# Altium PCB LPEDT_Assignment1_PCB.PcbDoc
Units mil, origin at the board's own origin, x right, y up, seen from the top; angles counter-clockwise.
Board outline 984.25 x 984.25 mil, 2 copper layers (Top Layer, Bottom Layer); 16 components, 8 nets, 37 pads, 8 vias.
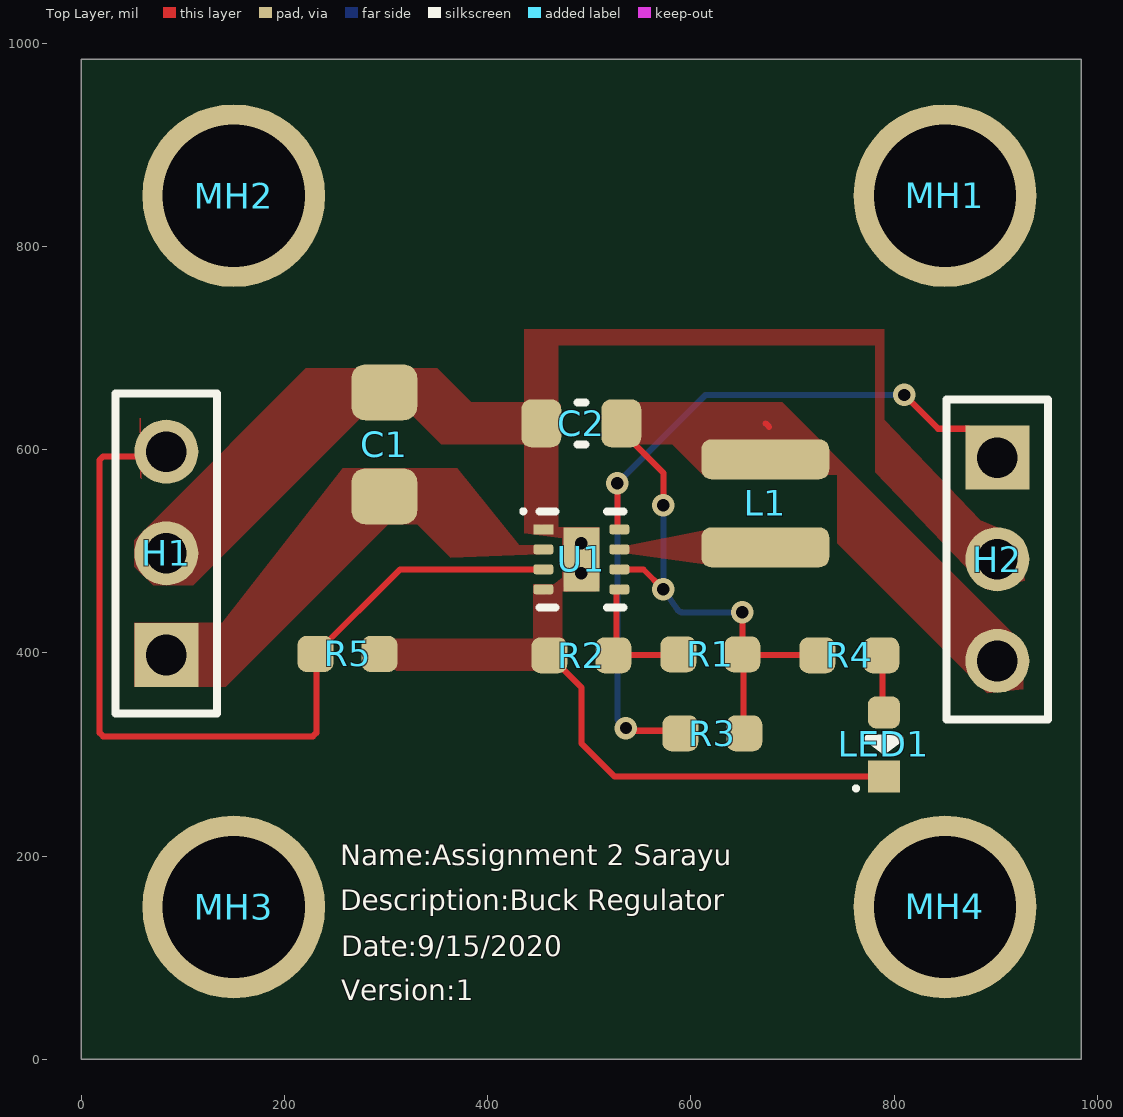
[diagram p0: Top Layer view]
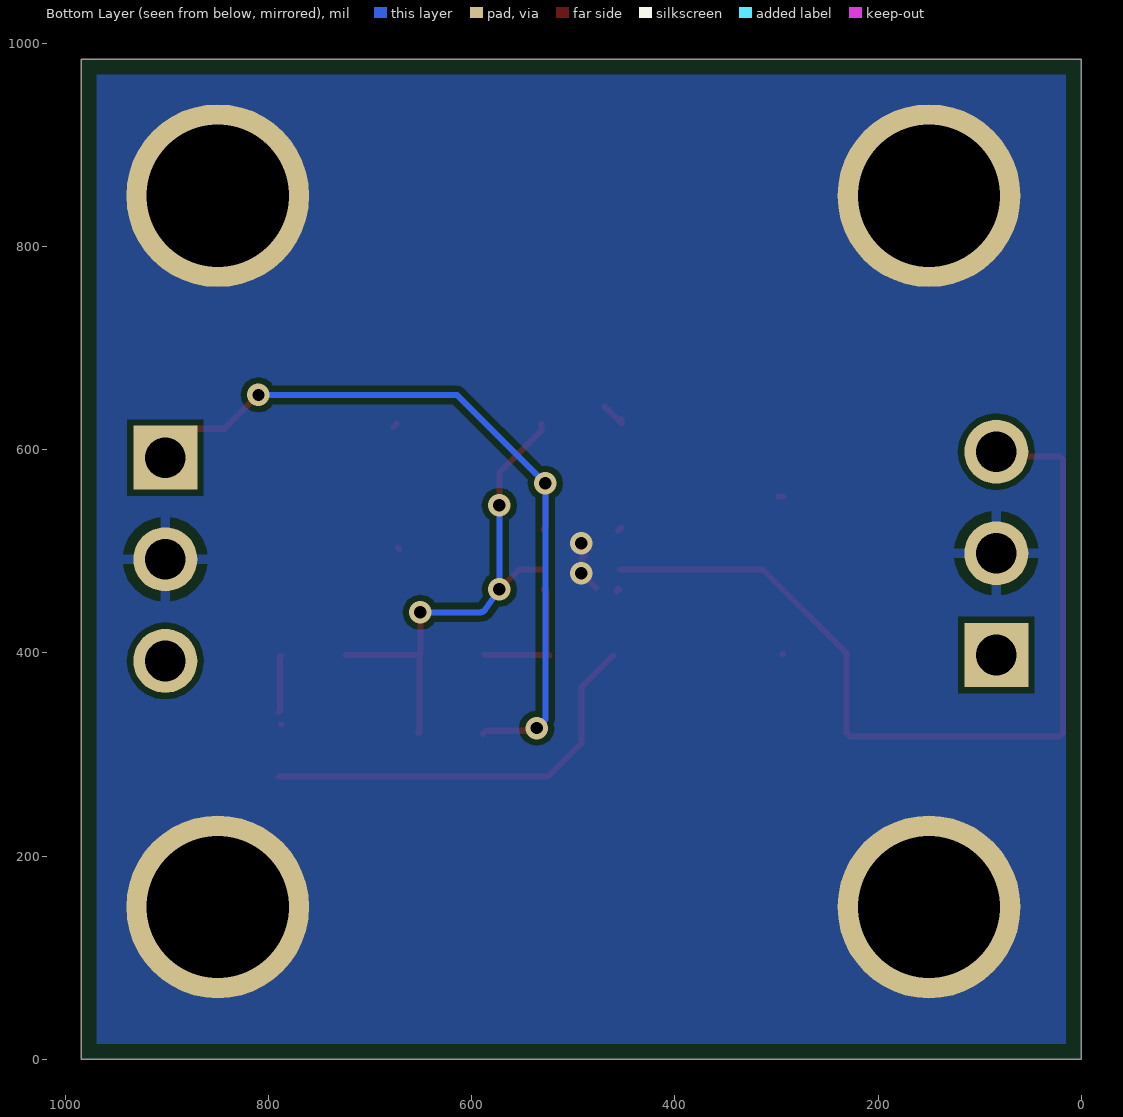
[diagram p1: Bottom Layer view, seen from below]
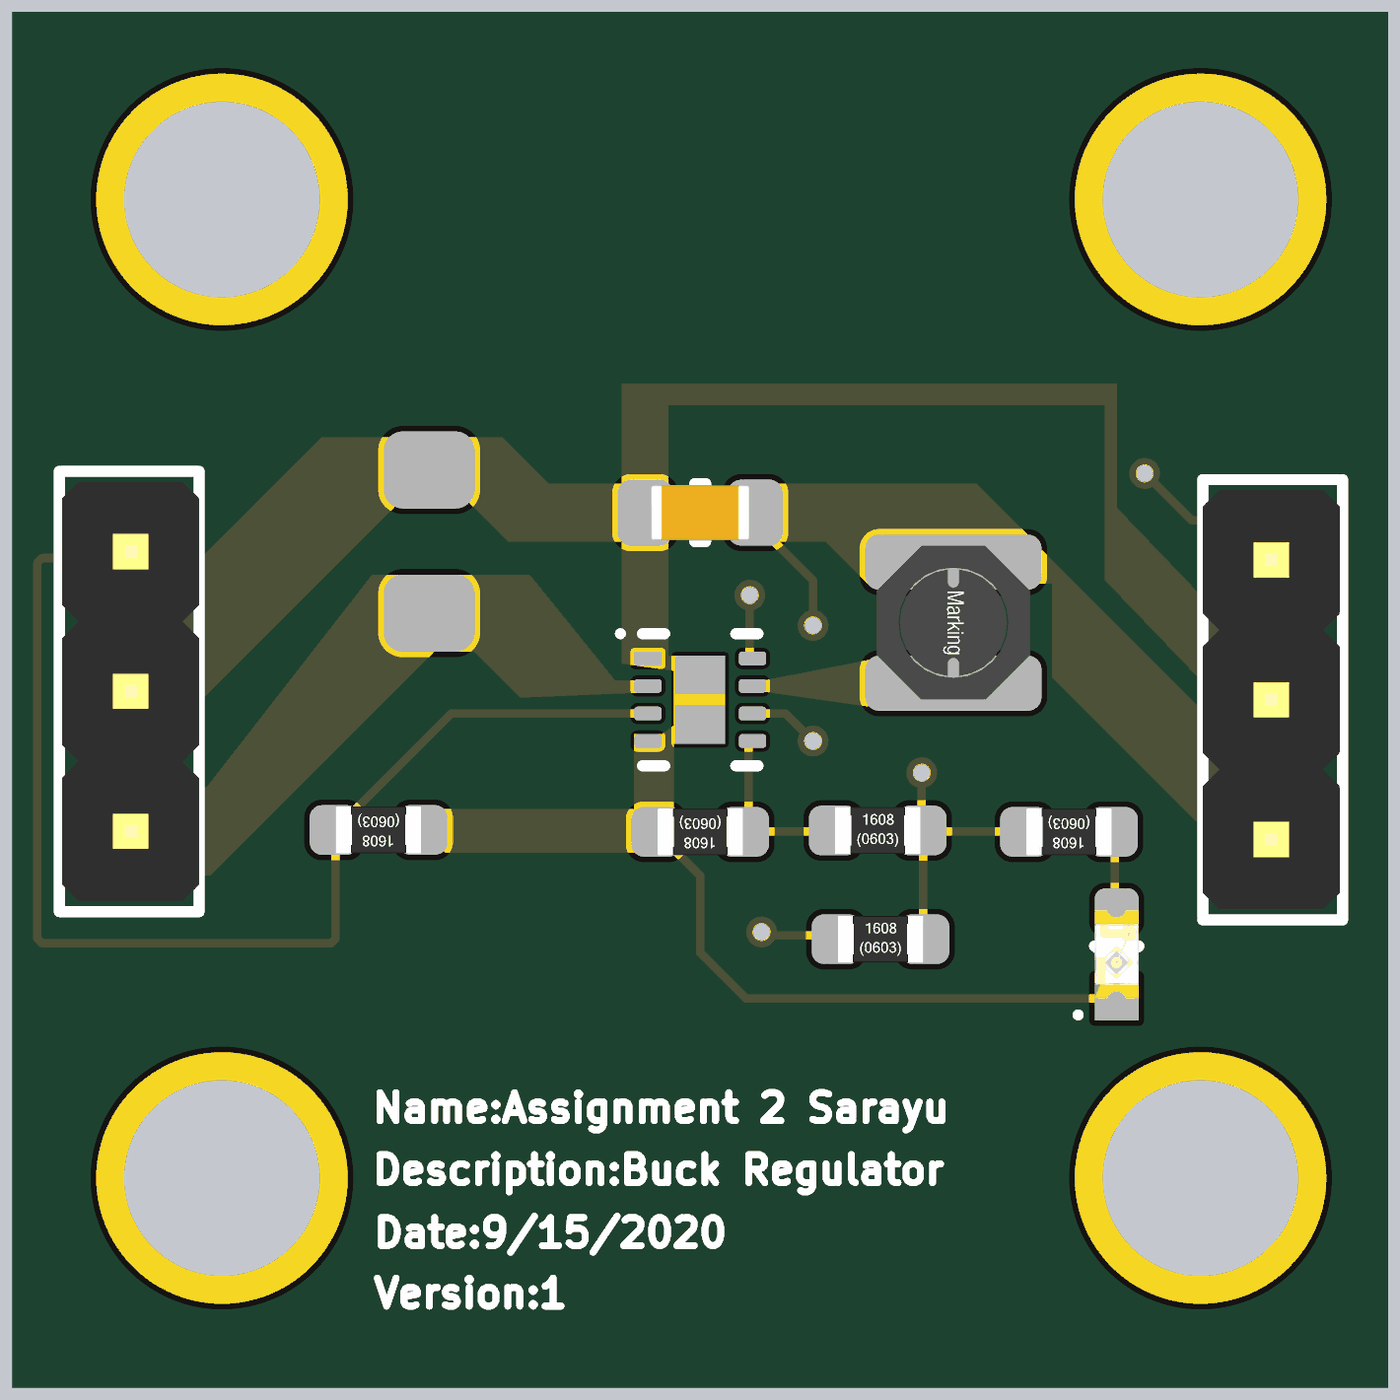
[diagram p2: 3D render of the assembled board from above, using the file's embedded part models]

## Layer stack, top to bottom
Top Solder: solder mask 0.4, Solder Resist, Dk 3.5
Top Layer: signal copper 1.4
Dielectric 1: dielectric 12.6, FR-4, Dk 4.8
Bottom Layer: signal copper 1.4
Bottom Solder: solder mask 0.4, Solder Resist, Dk 3.5

## Board outline
0,0 0,984.25 984.25,984.25 984.25,0

## Design rules (kind name [scope] priority, off if disabled: settings)
BoardOutlineClearance [All] p1: gap=15 ignorepadtopadclearanceinfootprint=FALSE
Clearance [All] p1: gap=6 ignorepadtopadclearanceinfootprint=FALSE
HoleSize [All] p1: absolutevalues=TRUE maxlimit=140 minlimit=1 maxpercent=80.000 minpercent=20.000
MinimumSolderMaskSliver [All] p1: minsoldermaskwidth=4
PolygonConnect GroundLayer [IsNamedPolygon('GND_L02_P062') vs HasFootprint('HOLE_#4')] p1: connectstyle=Direct reliefconductorwidth=10 reliefentries=4 polygonreliefangle="90 Angle" airgapwidth=10
PolygonConnect TopLayer [IsNamedPolygon('SW_L01_P036')or IsNamedPolygon('GND_L01_P046') or IsNamedPolygon('GND_L01_P054') or IsNamedPolygon('GND_L01_P057') or IsNamedPolygon('+VIN_L01_P040') or IsNamedPolygon('+6V_VOUT_L01_P059') or IsNamedPolygon('+6V_VOUT_L01_P050')] p2: connectstyle=Direct reliefconductorwidth=10 reliefentries=4 polygonreliefangle="90 Angle" airgapwidth=10
PolygonConnect [All] p3: thpad.connectstyle=Relief thpad.reliefconductorwidth=10 thpad.reliefentries=4 thpad.polygonreliefangle="90 Angle" thpad.airgapwidth=10 smdpad.connectstyle=Relief smdpad.reliefconductorwidth=10 smdpad.reliefentries=4 smdpad.polygonreliefangle="90 Angle" smdpad.airgapwidth=10 via.connectstyle=Direct via.reliefconductorwidth=10 via.reliefentries=4 via.polygonreliefangle="90 Angle" via.airgapwidth=10
RoutingVias [All] p1: holewidth=12 width=22 viastyle="Through Hole" minholewidth=12 minwidth=22 maxholewidth=16 maxwidth=26
SolderMaskExpansion [All] p1: expansion=4 istentingtop=FALSE
Width [All] p1: maxlimit=12 minlimit=6 preferedwidth=8 minimp=50.000000 maximp=50.000000 favimp=50.000000 checkconnectedcopper=TRUE
28 further rules are at their usual default settings.

## Components (designator, comment, footprint, x,y, rotation, side; value= is the part's Value field where it differs from the comment)
C1 "10UF 25V X5R 0805" CAP_2012X14 298.23,605.32 r90 top
C2 "22uF 10V X5R 0603" CAP_0603_1MM 492.13,625.98 r180 top
H1 "0.1\" Header" 3-PIN_MALE_HEADER_01-IN 83.66,498.03 r90 top
H2 "0.1\" Header" 3-PIN_MALE_HEADER_01-IN 901.57,492.13 r270 top
L1 "3.3 uH 1.5 A" IND_2828x30 673.23,547.24 r90 top
LED1 "GRN 0603" LED_0603_GRN_WL-SMCW 790,310 r90 top
MH1 "#4 Hole" HOLE_#4 850,850 r0 top
MH2 "#4 Hole" HOLE_#4 150,850 r0 top
MH3 "#4 Hole" HOLE_#4 150,150 r0 top
MH4 "#4 Hole" HOLE_#4 850,150 r0 top
R1 "2M Ohm 1%" RES_0603_1608X06 619.09,398.62 r0 top
R2 "316K Ohm 1%" RES_0603_1608X06 492.13,397.64 r180 top
R3 "100k 1%" RES_0603_1608X06 621.06,320.87 r0 top
R4 "140 Ohm 1%" RES_0603_1608X06 755.91,397.64 r180 top
R5 "100k 1%" RES_0603_1608X06 262,399 r180 top
U1 "TPS62160DSGR" 8-DFN_2X2 492.13,492.13 r0 top

## Footprints (in the part's own frame and the unit in brackets; to place one, negate y for a bottom-side part, rotate by r counter-clockwise, add the part's x,y. Pads: shape width x height; smd on the part's side, far side on the other; paste and mask are expansions set on the pad)
3-PIN_MALE_HEADER_01-IN [mm] ".025 SQ Post Terminal Strip Assembly, 1x3 Pins, Vertical, 2.54mm Pitch, Male"
  rect 1.6x1.6 hole 1.02: 1(-2.54,0)
  round 1.6 hole 1.02: 2(0,0) 3(2.54,0)
  silkscreen extent -4,-1.27 4,1.27, body extent -3.81,-1.27 3.81,1.22, height 8.54
8-DFN_2X2 [mm] "DFN, 8-Leads, Body 2.00x2.00mm, Pitch 0.50mm, Thermal Pad 1.60x0.69mm, IPC Medium Density"
  rect 0.5x0.25 smd mask+0.07: 1(-0.95,0.75)
  rrect50% 0.5x0.25 smd mask+0.07: 2(-0.95,0.25) 3(-0.95,-0.25) 4(-0.95,-0.75) 5(0.95,-0.75) 6(0.95,-0.25) 7(0.95,0.25) 8(0.95,0.75)
  rect 0.9x1.6 smd paste-1 mask+0.07: PAD(0,0)
  silkscreen extent -1.5,-1.2 1.05,1.25, body extent -1.05,-1.05 1.05,1.05, height 0.8
CAP_0603_1MM [mm] "Chip Capacitor, 2-Leads, Body 1.60x0.80mm, IPC Medium Density"
  rrect50% 1x1.2 smd: 1(-1,0) 2(1,0)
  silkscreen extent -0.1,-0.53 0.1,0.53, body extent -0.9,-0.5 0.9,0.5, height 1
CAP_2012X14 [mm] "Chip Capacitor, 2-Leads, Body 2.00x1.25mm, IPC Medium Density"
  rrect50% 1.4x1.65 smd: 1(-1.3,0) 2(1.3,0)
  body extent -1.07,-0.7 1.07,0.7, height 1.4
HOLE_#4 [mil]
  round 180 hole 140: 1(0,0)
IND_2828x30 [mm] "Precision Wire Wound Inductor, 2-Leads, Body 2.80x2.80mm, IPC Medium Density"
  rrect50% 1x3.2 smd: 1(-1.1,0) 2(1.1,0)
  body extent -1.4,-1.4 1.4,1.4, height 2.8
LED_0603_GRN_WL-SMCW [mm] "SODFL, 2-Leads, Body 0.80x1.80mm, IPC Medium Density"
  rrect50% 0.8x0.8 smd: A(0.8,0)
  rect 0.8x0.8 smd: C(-0.8,0)
  silkscreen extent -1.15,-0.4 0.15,0.75, body extent -0.8,-0.4 0.8,0.4, height 0.71
RES_0603_1608X06 [mm] "Chip Resistor, 2-Leads, Body 1.60x0.80mm, IPC Medium Density"
  rrect50% 0.9x0.9 smd: 1(-0.8,0) 2(0.8,0)
  body extent -0.78,-0.43 0.77,0.42, height 0.45

## Part data
C1: library part GRM21BR61E106KA73K, "CAP CER 10UF 25V X5R 0805", Capacitance=10uF, Case/Package=0805, Dielectric=X5R, Manufacturer=Murata, Max Operating Temperature=85°C, Min Operating Temperature=-55°C, Package Quantity=10000, Tolerance=10%, Voltage Rating=25V, Category="Ceramic Capacitors", ComponentLink1Description=http://www.mouser.com/ds/2/281/c02e-2905.pdf?src-supplier=Mouser, ComponentLink1URL=http://www.mouser.com/ds/2/281/c02e-2905.pdf?src-supplier=Mouser, ComponentLink2Description=http://search.murata.co.jp/Ceramy/image/img/A01X/G101/ENG/GRM21BR61E106KA73-01.pdf?src-supplier=Digi-Key, ComponentLink2URL=http://search.murata.co.jp/Ceramy/image/img/A01X/G101/ENG/GRM21BR61E106KA73-01.pdf?src-supplier=Digi-Key, ComponentLink3Description=https://search.murata.co.jp/Ceramy/image/img/A01X/G101/ENG/GRM21BR61E106KA73-01.pdf?src-supplier=Digi-Key, ComponentLink3URL=https://search.murata.co.jp/Ceramy/image/img/A01X/G101/ENG/GRM21BR61E106KA73-01.pdf?src-supplier=Digi-Key, Length=0.079inch, Manufacturer Part Number=GRM21BR61E106KA73K, Mount="Surface Mount", Packaging="Tape and Reel", Pricing 1="1=0.25000, 10=0.17200, 50=0.10340, 100=0.08740, 500=0.05978, 1000=0.05288, 2500=0.05058, 5000=0.04598 (USD)", RoHS=Yes, Stock 1=51226, Supplier 1=Digi-Key, Thickness=0.055inch, Voltage Rating (DC)=25V, Weight=0.000335oz, Width=0.049inch
C2: library part GRM188R61A226ME15D, "CAP CER 22UF 10V X5R 0603", Capacitance="22 uF", Case Code - in=0603, Case Code - mm=1608, Dielectric=X5R, Manufacturer=Murata, Maximum Operating Temperature="+ 85 C", Minimum Operating Temperature="- 55 C", Package / Case="0603 (1608 metric)", Supplier Part Number 1=490-10476-1-ND, Tolerance="20 %", Voltage Rating DC="10 VDC", Brand="Murata Electronics", ComponentLink1Description=http://www.farnell.com/datasheets/2047978.pdf?src-supplier=Element14, ComponentLink1URL=http://www.farnell.com/datasheets/2047978.pdf?src-supplier=Element14, Factory Pack Quantity=4000, Height="0.8 mm", Length="1.6 mm", Manufacturer Part Number=GRM188R61A226ME15D, Packaging=Reel, Pricing 1="1=0.33, 10=0.226, 50=0.1506, 100=0.1279, 500=0.0903, 1000=0.079 (USD)", Product="General Type MLCCs", Product Category="Multilayer Ceramic Capacitors MLCC - SMD/SMT", RoHS=True, Series=GRM, Stock 1=849458, Supplier 1=Digi-Key, Termination Style=SMD/SMT, Type="Voltage and Temperature Derating Recommended Product", Unit Weight="0.000222 oz", Width="0.8 mm"
H1 H2: library part PRPC003SAAN-RC, "CONN HEADER VERT 3POS 2.54MM", Color=Black, Manufacturer=Sullins, Standard Package=1, Supplier Part Number 1=S1011EC-03-ND, Category="Connectors, Interconnects", ComponentLink1Description=https://media.digikey.com/PDF/Data%20Sheets/Sullins%20PDFs/xRxCzzzSxxN-RC_ST_11635-B.pdf?src-supplier=Digi-Key, ComponentLink1URL=https://media.digikey.com/PDF/Data%20Sheets/Sullins%20PDFs/xRxCzzzSxxN-RC_ST_11635-B.pdf?src-supplier=Digi-Key, Connector Type="Header, Unshrouded, Breakaway", Contact Finish=Gold, Contact Finish Thickness=Flash, Contact Mating Length="0.230\" (5.84mm)", Contact Type="Male Pin", Family="Rectangular Connectors - Headers, Male Pins", Fastening Type=-, Features=-, Manufacturer Part Number=PRPC003SAAN-RC, Mounting Type="Through Hole", Number of Positions=3, Number of Positions Loaded=All, Number of Rows=1, Online Catalog="0.100\" (2.54mm) Pitch Connector Headers", Other Names="S9510E-03  S9510E-03-ND", Packaging=Bulk, Pitch="0.100\" (2.54mm)", Pricing 1="1=0.12, 10=0.109, 25=0.0812, 50=0.0696, 100=0.0673, 250=0.058, 500=0.0557 (USD)", Row Spacing=-, Series=-, Stock 1=19067, Supplier 1=Digi-Key, Termination=Solder
L1: library part 744025003, "WURTH ELEKTRONIK - 744025003 - Leistungsinduktivität (SMD), 3.3 µH, 1.5 A, Geschirmt, 1.8 A, Baureihe WE-TPC", Case/Package=Nonstandard, Current Rating=1.5A, DC Resistance (DCR)=101mR, Inductance=3.3uH, Inductance Tolerance=20%, Manufacturer="Wurth Electronics", Max Operating Temperature=125°C, Min Operating Temperature=-40°C, Package Quantity=1, Resistor Type=Wirewound, Saturation Current=1.8A, Self Resonant Frequency=100MHz, Series Resistance=85MR, Test Frequency=100kHz, Category="Fixed Inductors", ComponentLink1Description=https://datasheet.ciiva.com/11803/0900766b80f886b5-11803594.pdf?src-supplier=RSComponents, ComponentLink1URL=https://datasheet.ciiva.com/11803/0900766b80f886b5-11803594.pdf?src-supplier=RSComponents, ComponentLink2Description=https://datasheet.ciiva.com/1060/744025003-1060566.pdf?src-supplier=Digi-Key, ComponentLink2URL=https://datasheet.ciiva.com/1060/744025003-1060566.pdf?src-supplier=Digi-Key, ComponentLink3Description=https://datasheet.ciiva.com/4954/744025003-88791-4954796.pdf?src-supplier=Mouser, ComponentLink3URL=https://datasheet.ciiva.com/4954/744025003-88791-4954796.pdf?src-supplier=Mouser, ComponentLink4Description=https://datasheet.ciiva.com/14123/744025003-eng-tds-14123829.pdf?src-supplier=Distrelec, ComponentLink4URL=https://datasheet.ciiva.com/14123/744025003-eng-tds-14123829.pdf?src-supplier=Distrelec, ComponentLink5Description=https://datasheet.ciiva.com/1060/744025003-1060567.pdf?src-supplier=Digi-Key, ComponentLink5URL=https://datasheet.ciiva.com/1060/744025003-1060567.pdf?src-supplier=Digi-Key, ComponentLink6Description=https://datasheet.ciiva.com/1060/744025003-1060568.pdf?src-supplier=Digi-Key, ComponentLink6URL=https://datasheet.ciiva.com/1060/744025003-1060568.pdf?src-supplier=Digi-Key, Core Material=Ferrite, Depth=2.8mm, Height=2.8mm, Height - Seated (Max)=0.118inch, Length=2.8mm, Manufacturer Part Number=744025003, Max DC Current=1.5A, Mount="Surface Mount", Number of Pins=2, Packaging="Cut Tape", Pricing 1="1=1.54000, 10=1.48000, 50=1.36000, 100=1.13000, 250=1.02000 (USD)", REACH SVHC=Unknown, RMS Current (Irms)=1.5A, RoHS=Yes, Shielding=Shielded, Stock 1=2583, Supplier 1=Digi-Key, Termination=SMD/SMT, Tolerance=20%, Width=0.11inch
LED1: library part 150060GS75000, "LED, 0603, GREEN, 430MCD, 520NM", Color=Green, Current - Test=20mA, Manufacturer="Wurth Electronics", Millicandela Rating=430mcd, Package / Case="0603 (1608 Metric)", Standard Package=4,000, Supplier Part Number 1=732-4971-1-ND, Voltage - Forward (Vf) (Typ)=3.2V, 3D Model="SMCW_0603.igs /  / SMCW_0603.stp /  / SMCW_0603.wrl", Category=Optoelectronics, ComponentLink1Description=https://katalog.we-online.de/led/datasheet/150060GS75000.pdf?src-supplier=Digi-Key, ComponentLink1URL=https://katalog.we-online.de/led/datasheet/150060GS75000.pdf?src-supplier=Digi-Key, ComponentLink2Description=http://www.produktinfo.conrad.com/datenblaetter/750000-774999/759427-da-01-en-CHIPLED_0603_W_KL_GRUEN_150060GS75000.pdf?src-supplier=Conrad, ComponentLink2URL=http://www.produktinfo.conrad.com/datenblaetter/750000-774999/759427-da-01-en-CHIPLED_0603_W_KL_GRUEN_150060GS75000.pdf?src-supplier=Conrad, Dynamic Catalog="0603 Rectangle with Flat Top Chip LEDs", Family="LED Indication - Discrete", Height=0.70mm, Lens Style/Size="Rectangle with Flat Top, 1.1mm x 0.7mm", Lens Type=Clear, Manufacturer Part Number=150060GS75000, Mounting Type="Surface Mount", Online Catalog="0603 Rectangle with Flat Top Chip LEDs", Other Names=732-4971-2, Packaging="Tape & Reel (TR)", Pricing 1="1=0.14, 50=0.129, 100=0.11, 500=0.095 (USD)", Series=WL-SMCW, Size / Dimension="1.60mm L x 0.80mm W", Stock 1=34964, Supplier 1=Digi-Key, Viewing Angle=140°, Wavelength - Dominant=520nm, Wavelength - Peak=515nm
MH1 MH2 MH3 MH4: library part HOLE_#4
R1: library part RC0603FR-072ML, "Res Thick Film 0603 2M Ohm 1% 0.1W(1/10W) +/-100ppm/ßC Epoxy SMD T/R", Case Code (Imperial)=0603, Case Code (Metric)=1608, Manufacturer=Yageo, Max Operating Temperature=155°C, Max Power Dissipation=100mW, Min Operating Temperature=-55°C, Package Quantity=1, Resistance=2MR, Resistor Type="Thick Film", Temperature Coefficient=100ppm/°C, Tolerance=1%, Voltage Rating=75V, Voltage Rating (DC)=50V, Case/Package=0603, Category="Chip SMD Resistors", ComponentLink1Description=https://datasheet.ciiva.com/11808/0900766b80f96399-11808743.pdf?src-supplier=RSComponents, ComponentLink1URL=https://datasheet.ciiva.com/11808/0900766b80f96399-11808743.pdf?src-supplier=RSComponents, ComponentLink2Description=https://datasheet.ciiva.com/2454/pyu-r-int-thick-7-2454115.pdf?src-supplier=Digi-Key, ComponentLink2URL=https://datasheet.ciiva.com/2454/pyu-r-int-thick-7-2454115.pdf?src-supplier=Digi-Key, ComponentLink3Description=https://datasheet.ciiva.com/2454/pyu-r-int-thick-7-2454116.pdf?src-supplier=Digi-Key, ComponentLink3URL=https://datasheet.ciiva.com/2454/pyu-r-int-thick-7-2454116.pdf?src-supplier=Digi-Key, ComponentLink4Description=https://datasheet.ciiva.com/2454/pyu-r-int-thick-7-2454114.pdf?src-supplier=Digi-Key, ComponentLink4URL=https://datasheet.ciiva.com/2454/pyu-r-int-thick-7-2454114.pdf?src-supplier=Digi-Key, Depth=0.8mm, Features="Moisture Resistant", Height=0.45mm, Lead Free="Lead Free", Length=1.6mm, Manufacturer Part Number=RC0603FR-072ML, Mount="Surface Mount", Number of Terminations=2, Packaging="Tape and Reel", Power Rating=100mW, Pricing 1="1=0.10000, 10=0.02200, 100=0.00900, 1000=0.00405, 2500=0.00352 (USD)", RoHS=Yes, Stock 1=594795, Supplier 1=Digi-Key, Termination=SMD/SMT, Weight=7.1E-05oz, Width=0.8mm
R2: library part RC0603FR-0731K6L, "Res Thick Film 0603 31.6K Ohm 1% 0.1W(1/10W) ?100ppm/?C Molded SMD Paper T/R", Case Code (Imperial)=0603, Case Code (Metric)=1608, Manufacturer=Yageo, Max Operating Temperature=155°C, Max Power Dissipation=100mW, Min Operating Temperature=-55°C, Package Quantity=1, Resistance=31.6kR, Resistor Type="Thick Film", Temperature Coefficient=100ppm/°C, Tolerance=1%, Voltage Rating=50V, Working Voltage=75V, Case/Package=0603, Category="Chip SMD Resistors", ComponentLink1Description=https://datasheet.ciiva.com/15189/getdatasheetpartid-687536-15189700.pdf?src-supplier=Verical, ComponentLink1URL=https://datasheet.ciiva.com/15189/getdatasheetpartid-687536-15189700.pdf?src-supplier=Verical, ComponentLink2Description=https://datasheet.ciiva.com/2455/pyu-r-int-thick-7-2455125.pdf?src-supplier=Digi-Key, ComponentLink2URL=https://datasheet.ciiva.com/2455/pyu-r-int-thick-7-2455125.pdf?src-supplier=Digi-Key, ComponentLink3Description=https://datasheet.ciiva.com/15189/getdatasheetpartid-329296-15189701.pdf?src-supplier=Verical, ComponentLink3URL=https://datasheet.ciiva.com/15189/getdatasheetpartid-329296-15189701.pdf?src-supplier=Verical, ComponentLink4Description=https://datasheet.ciiva.com/2455/pyu-r-int-thick-7-2455126.pdf?src-supplier=Digi-Key, ComponentLink4URL=https://datasheet.ciiva.com/2455/pyu-r-int-thick-7-2455126.pdf?src-supplier=Digi-Key, ComponentLink5Description=https://datasheet.ciiva.com/2455/pyu-r-int-thick-7-2455127.pdf?src-supplier=Digi-Key, ComponentLink5URL=https://datasheet.ciiva.com/2455/pyu-r-int-thick-7-2455127.pdf?src-supplier=Digi-Key, Depth=0.8mm, Features="Moisture Resistant", Height=0.022inch, Lead Free="Lead Free", Length=1.6mm, Manufacturer Part Number=RC0603FR-0731K6L, Military Standard=Not, Number of Terminations=2, Packaging="Tape and Reel", Power Rating=100mW, Pricing 1="1=0.10000, 10=0.02200, 100=0.00900, 1000=0.00405, 2500=0.00352 (USD)", RoHS=Yes, Stock 1=121296, Supplier 1=Digi-Key, Termination=SMD/SMT, Voltage Rating (DC)=50V, Width=0.8mm
R3 R5: library part RC0603FR-07100KL, "RES SMD 100K OHM 1% 1/10W 0603", Case Code - in=0603, Case Code - mm=1608, Manufacturer=Yageo, Operating Temperature Range="- 55 C to + 155 C", Power Rating="100 mW", Resistance="100 kOhms", Supplier Part Number 1=311-100KHRCT-ND, Temperature Coefficient="100 PPM / C", Tolerance="1 %", Voltage Rating="50 V", ComponentLink1Description=http://www.farnell.com/datasheets/2167052.pdf?src-supplier=Element14, ComponentLink1URL=http://www.farnell.com/datasheets/2167052.pdf?src-supplier=Element14, ComponentLink2Description=http://www.farnell.com/datasheets/1868787.pdf?src-supplier=Element14, ComponentLink2URL=http://www.farnell.com/datasheets/1868787.pdf?src-supplier=Element14, ComponentLink3Description=http://documents.rs-components.com/techlib://itc_doclist_GB.htm?stockno=5048940&src-supplier=RSComponents, ComponentLink3URL=http://documents.rs-components.com/techlib://itc_doclist_GB.htm?stockno=5048940&src-supplier=RSComponents, ComponentLink4Description=http://www.farnell.com/datasheets/443971.pdf?src-supplier=Element14, ComponentLink4URL=http://www.farnell.com/datasheets/443971.pdf?src-supplier=Element14, Manufacturer Part Number=RC0603FR-07100KL, Packaging=Reel, Pricing 1="1=0.1, 10=0.022, 100=0.009, 1000=0.0041, 2500=0.0035 (USD)", Product="Thick Film Resistors General Purpose", Series=RC, Stock 1=13478446, Supplier 1=Digi-Key, Termination Style=SMD/SMT
R4: library part RC0603FR-07140RL, "Thick Film Resistors 140 OHM 1%", Case Code (Imperial)=0603, Case Code (Metric)=1608, Manufacturer=Yageo, Max Operating Temperature=155°C, Min Operating Temperature=-55°C, Power Rating=100mW, Resistance=140R, Resistor Type="Thick Film", Temperature Coefficient=100ppm/°C, Tolerance=1%, Voltage Rating=50V, Case/Package=0603, Category="Chip SMD Resistors", ComponentLink1Description=https://datasheet.ciiva.com/11808/0900766b80c66297-11808828.pdf?src-supplier=RSComponents, ComponentLink1URL=https://datasheet.ciiva.com/11808/0900766b80c66297-11808828.pdf?src-supplier=RSComponents, ComponentLink2Description=https://datasheet.ciiva.com/15189/getdatasheetpartid-329205-15189606.pdf?src-supplier=Verical, ComponentLink2URL=https://datasheet.ciiva.com/15189/getdatasheetpartid-329205-15189606.pdf?src-supplier=Verical, Depth=0.8mm, Height=0.45mm, Lead Free="Lead Free", Length=1.6mm, Manufacturer Part Number=RC0603FR-07140RL, Military Standard=Not, Mount="Surface Mount", Packaging="Tape and Reel", Pricing 1="1=0.10000, 10=0.02200, 100=0.00900, 1000=0.00405, 2500=0.00352 (USD)", RoHS=Yes, Stock 1=606987, Supplier 1=Digi-Key, Termination=SMD/SMT, Voltage Rating (DC)=50V
U1: "IC REG BUCK ADJ 1A SYNC 8WSON", Case/Package=SOIC, Manufacturer="Texas Instruments", Max Input Voltage=17V, Max Operating Temperature=125°C, Max Output Current=1A, Max Output Voltage=6V, Min Input Voltage=3V, Min Operating Temperature=-40°C, Min Output Voltage=900mV, Package Quantity=3000, Quiescent Current=17uA, Switching Frequency=2.25MHz, Category="Voltage Regulators - Switching", ComponentLink1Description=https://datasheet.ciiva.com/2026/tps62161-2026049.pdf?src-supplier=Digi-Key, ComponentLink1URL=https://datasheet.ciiva.com/2026/tps62161-2026049.pdf?src-supplier=Digi-Key, ComponentLink2Description=https://datasheet.ciiva.com/2026/tps62160-2026414.pdf?src-supplier=Digi-Key, ComponentLink2URL=https://datasheet.ciiva.com/2026/tps62160-2026414.pdf?src-supplier=Digi-Key, ComponentLink3Description=https://datasheet.ciiva.com/2026/tps62160-2026415.pdf?src-supplier=Digi-Key, ComponentLink3URL=https://datasheet.ciiva.com/2026/tps62160-2026415.pdf?src-supplier=Digi-Key, Contact Plating=Gold, Lead Free="Lead Free", Manufacturer Part Number=TPS62160DSGR, Number of Outputs=1, Number of Pins=8, Operating Supply Voltage=17V, Output Configuration=Positive, Output Current=1A, Output Type=Adjustable, Output Voltage=6V, Packaging="Tape and Reel", Pricing 1="1=1.59000, 10=1.43100, 25=1.35000, 100=1.08000, 250=0.94500, 500=0.91800, 1000=0.72900 (USD)", Radiation Hardening=No, REACH SVHC="No SVHC", RoHS=Yes, Stock 1=51561, Supplier 1=Digi-Key, Synchronous Rectifier=Yes

## Via types
v1: diameter 22, hole 12, Top Layer to Bottom Layer, tented both sides, 8 vias

## Nets (pads, with @x,y where several pads share a name; then routed paths per layer and width w, separated by ;. In a path a pad name is that pad's centre, name@x,y a point inside that pad or via, vN(x,y) a via of type N, cw(c..) or ccw(c..) an arc to the next point about the centre after c; other vN are vias at no path point)
+6V_VOUT: C2.1 H2.3 L1.2 R1.2 R3.2 R4.2 U1.6 | length 534.3
  Top Layer w6: U1.6 529.68,482.13 553.31,482.13 v1(572.83,462.6) ; C2.1 531.5,618.5 572.83,577.17 v1(572.83,545.28) ; v1(650.59,439.96) R1.2 R1.2@651.08,398.13 ; R3.2@652.56,323.33 R3.2 651.57,321.85 651.57,397.64 R1.2@651.08,398.13 ; 673.49,625.98 677,622.47 ; R4.2 723.92,398.13 R1.2@651.08,398.13 ; H2.3@906.1,396.06 H2.3@917.32,396.06
  Bottom Layer w6: v1@572,544.44 v1(572.83,545.28) v1(572.83,462.6) 586.79,442.53 ; 586.81,442.51 ccw(c591.72,445.96) 591.72,439.96 v1(650.59,439.96)
+VIN: C1.1 H1.1 U1.2 | length 12
  Top Layer w6: H1.1 H1.1@88.66,403.03 ; C1.1@293.31,554.13 C1.1
FB: R1.1 R2.1 U1.5 | length 131.2
  Top Layer w6: R2.1@526.57,397.64 R2.1 524.11,398.13 526.57,398.13 587.11,398.13 R1.1 ; R2.1@526.57,400.59 526.57,460.68 528.5,462.6 U1.5
GND: C1.2 C2.2 H1.2 H2.2 LED1.C MH1.1 MH2.1 MH3.1 MH4.1 R2.2 R5.1 U1.1 U1.4 U1.PAD | length 507.3
  Top Layer w6: R5.1 R5.1@294.18,398.32 ; C2.2@452.52,630.16 452.52,625.98 468.92,642.38 C2.2@469.15,642.38 ; U1.1@452.76,523.57 U1.1 U1.1@455.76,520.62 ; U1.4@455.76,463.63 U1.4 455.76,462.6 U1.4@457.68,460.68 ; R2.2 492.13,366.14 492.13,311.02 524.65,278.5 LED1.C ; U1.PAD@477.41,463.63 v1(492.13,478.35) U1.PAD U1.PAD@488.19,496.06 ; H2.2@913.39,496.06 H2.2@917.32,496.06
  Bottom Layer w10: H1.2 H1.2@97.83,498.03
  other v1: 492.13,507.87
NetH1_3: H1.3 R5.2 U1.3 | length 891.1
  Top Layer w6: H1.3@83.16,598.53 H1.3 79.13,593.5 21.51,593.5 18,589.99 18,321.43 21.51,317.91 227.78,317.91 231.3,321.43 231.3,398.2 R5.2 313.79,482.28 U1.3
NetLED1_A: LED1.A R4.1 | length 57.2
  Top Layer w6: R4.1 788.7,396.34 788.7,342.8 LED1.A
PWRGD: H2.1 R3.1 U1.8 | length 782.8
  Top Layer w6: v1(527.56,566.93) 527.56,523.62 U1.8 ; v1@536.39,326.39 v1(536,326) 538.57,323.43 586.23,323.43 589.18,320.48 R3.1 ; v1(810,654) 843.38,620.62 873.08,620.62 H2.1
  Bottom Layer w6: v1(536,326) 527.56,334.44 v1(527.56,566.93) 614.63,654 v1(810,654)
SW: L1.1 U1.7 | length 2.8
  Top Layer w6: L1.1@671.26,501.97 L1.1

## Polygon pours and split planes (outlines as drawn)
GND on Top Layer "GND_L01_P057" (solid, pour order 57): 435.95,649.61 435.95,517.97 473.16,512.8 473.16,473.8 464.8,467.52 444.72,467.52 444.62,382.52 475.75,382.52 475.75,412.76 473.16,415.35 473.16,460.63 509.84,460.63 509.84,523.62 469.56,523.62 469.56,649.61
+VIN on Top Layer "+VIN_L01_P040" (solid, pour order 40): 52.17,366.54 142.13,366.54 302.17,526.57 330.71,526.57 363.68,493.6 463.85,497.77 463.85,506.17 431.1,506.17 370.08,581.69 257.4,581.69 138.9,429.53 52.17,429.53
SW on Top Layer "SW_L01_P036" (solid, pour order 36): 520.41,506.17 538.65,506.17 613.12,520.74 733.34,520.74 733.34,487.13 613.12,487.13 538.65,497.77 520.41,497.77
+6V_VOUT on Top Layer "+6V_VOUT_L01_P059" (solid, pour order 59): 727.23,608.93 611.88,608.93 611.88,575.32 743.84,575.32 743.84,508.12 891.76,360.21 927.3,364.06 927.3,408.85 908.06,428.09
no net on Top Layer "NONET_L01_P055" (solid, pour order 55): 444.88,516.73
GND on Top Layer "GND_L01_P054" (solid, pour order 54): 278.37,414.12 444.15,414.12 445.51,412.76 475.75,412.76 475.75,382.52 309.98,382.52 308.62,383.88 278.37,383.88 278.37,414.12
no net on Top Layer "NONET_L01_P053" (solid, pour order 53): 311.21,407.86
no net on Top Layer "NONET_L01_P052" (solid, pour order 52): 278.37,383.88
+6V_VOUT on Top Layer "+6V_VOUT_L01_P050" (solid, pour order 50): 514.69,646.72 689.89,646.72 733.34,603.28 733.34,573.75 613.12,573.75 581.62,605.24 514.69,605.24
GND on Top Layer "GND_L01_P046" (solid, pour order 46): 70.62,529.53 52.17,511.08 52.17,484.99 70.62,466.54 110.24,466.54 276.67,632.97 326.67,632.97 354.4,605.24 469.56,605.24 469.56,702.69 781.5,702.76 781.5,577.76 892.4,462 928.53,470.96 923.85,514.4 884.78,530.58 790.35,629.39 790.35,718.43 435.95,718.43 435.95,646.72 383.79,646.72 350.49,680.02 221.11,680.02
no net on Top Layer "NONET_L01_P035" (solid, pour order 35): 519.69,504.43
no net on Top Layer "NONET_L01_P029" (solid, pour order 29): 519.69,504.43
no net on Top Layer "NONET_L01_P025" (solid, pour order 25): 211.61,481.3
no net on Top Layer "NONET_L01_P024" (solid, pour order 24): 233.27,504.92
no net on Top Layer "NONET_L01_P023" (solid, pour order 23): 233.27,504.92
no net on Top Layer "NONET_L01_P010" (solid, pour order 10): 58.07,630.91 58.07,572.93 59,572
no net on Top Layer "NONET_L01_P001" (solid, pour order 1): 58.07,630.91
no net on Top Layer "NONET_L01_P000" (solid, pour order 0): 59,572
GND on Bottom Layer "GND_L02_P062" (solid, pour order 62): 0,984.25 0,0 984.25,0 984.25,984.25

## Silkscreen, mask and mechanical layers (free items; w line width, h text height)
Top Overlay:
  text "Name:Assignment 2 Sarayu" at 255,190.8 h20
  text "Description:Buck Regulator" at 255,146.51 h20
  text "Date:9/15/2020" at 255.98,101.46 h20
  text "Version:1" at 255.98,58.15 h20
Outline:
  lines w10: 983.7,0 0,0 0,984.25 984.25,984.25 984.25,0.27 ; 983.98,0.27 984.25,0.27 ; 984.11,0.14 984.25,0.27